# EAGLE board SAM3U_Test_Schematic (EAGLE 6.4)
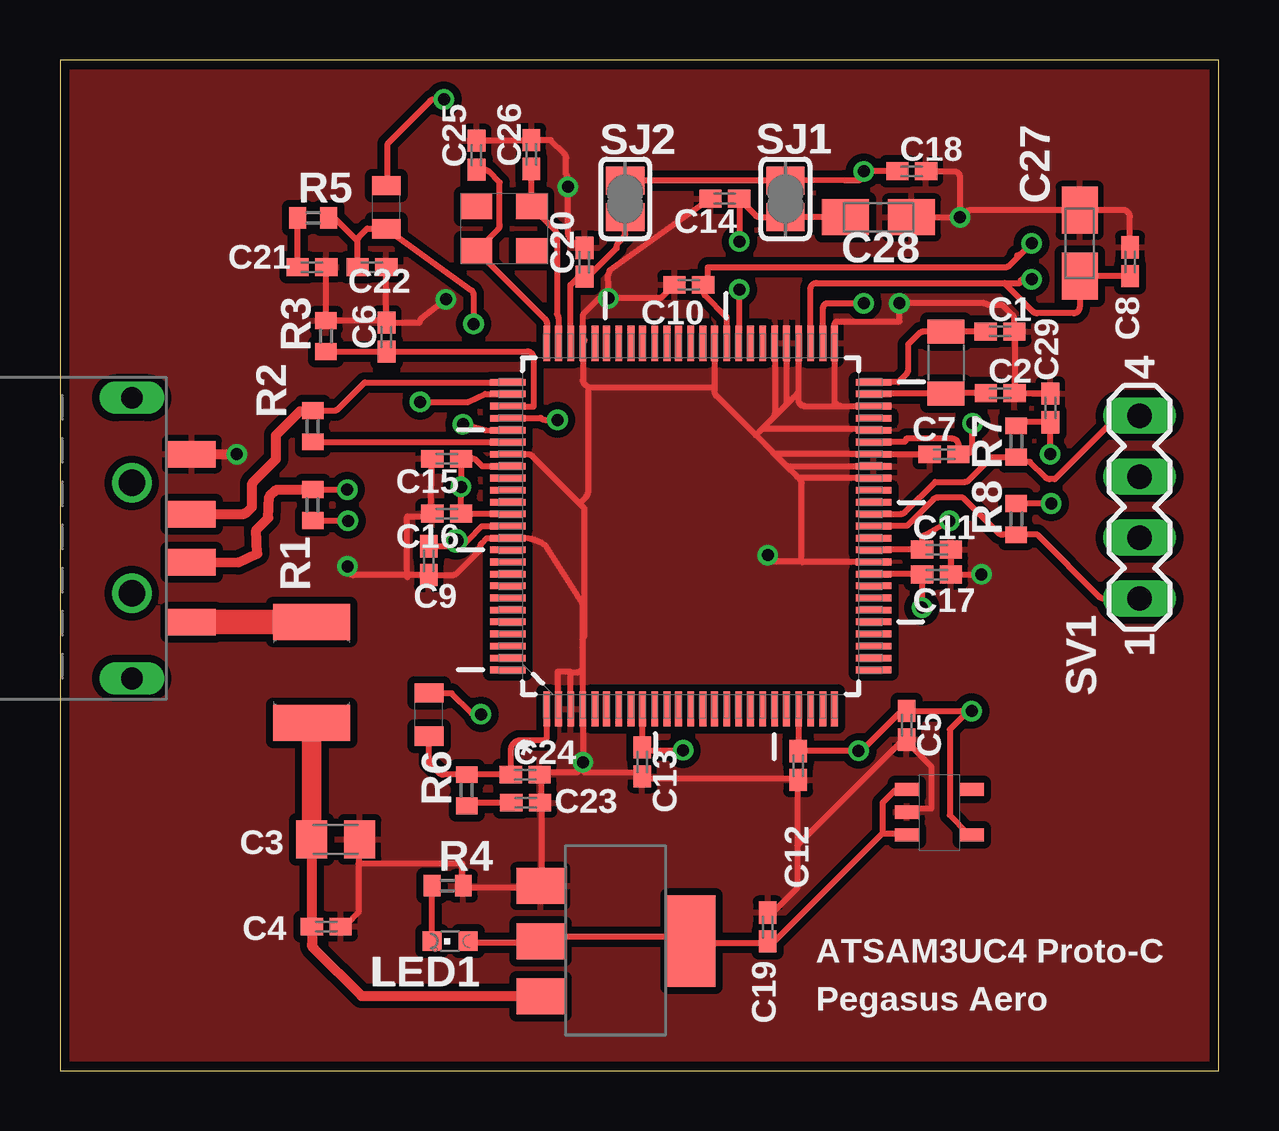
[diagram p0: board, top side]
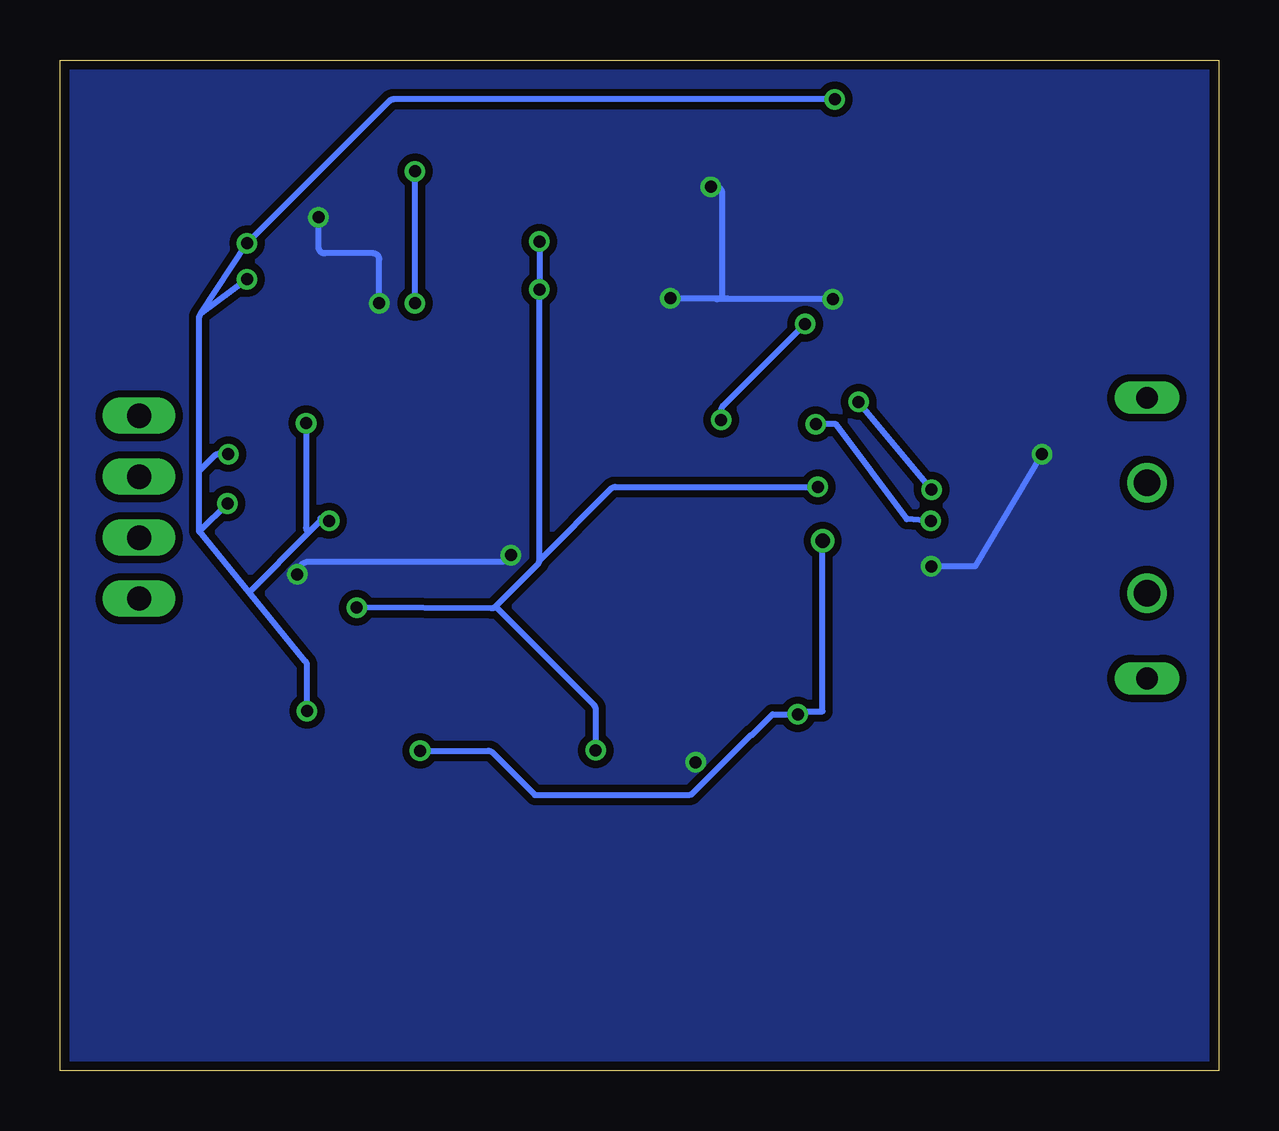
[diagram p1: board, bottom side, seen from below]

Size 48.3 x 42.14 mm. Coordinates in mm from the lower left corner, seen from the top.
Outline: 0,0 48.3,0 48.3,42.14 0,42.14 0,0
Copper layers (1*16): Top 0.0356mm / dielectric 1.5011mm / Bottom 0.0356mm
Design rules "LaenPCBOrder": minimum track width 6mil, minimum drill 13mil, track to track 6mil, track to pad 6mil, pad to pad 6mil, via to via 6mil, smd to smd 6mil, copper to edge 15mil, drill to drill 6mil, minimum pad ring 7mil, minimum via ring 7mil, stop-mask expansion 4mil, vias tented up to drill 0mil, thermal gap 10mil

## Footprints (pad centres in the part's own frame; a part is rotated, then mirrored left to right if it is on the bottom)
C0402K = smd 0.925 x 0.74: 1 -0.6,0; 2 0.6,0
C0805K = smd 1.3 x 1.6: 1 -1,0; 2 1,0
A/3216-18R = smd 1.95 x 1.5: + 1.375,0; - -1.375,0
TDK_MLZ_INDUCTOR_2012PACK = smd 0.8 x 1.2: 1 -0.4,0.6; 2 1.4,0.6
CHIPLED_0603 = smd 0.8 x 0.8: A 0,-0.75; C 0,0.75
R0402 = smd 0.7 x 0.9: 1 -0.65,0; 2 0.65,0
SJ = smd 1.168 x 1.6: 1 -0.762,0; 2 0.762,0
MA04-1 = drill 1.016 long: 1 -3.81,0; 2 -1.27,0; 3 1.27,0; 4 3.81,0
USB_TYPE_PLUG_KSTN_PACK = smd 1.1 x 2: 1 -3.5,-1.05; 2 -1,-1.05; 3 1,-1.05; 4 3.5,-1.05 | drill 0.9 pad 1.25 long: P$1 -5.85,1.45; P$2 5.85,1.45 | drill 1.1 pad 1.25: P$3 -2.3,1.45; P$4 2.3,1.45
QFP50P1600X1600X160-100N = smd 1.473 x 0.279: 1 -7.62,5.994; 2 -7.62,5.512; 3 -7.62,5.004; 4 -7.62,4.496; 5 -7.62,3.988; 6 -7.62,3.505; 7 -7.62,2.997; 8 -7.62,2.489; 9 -7.62,2.007; 10 -7.62,1.499; 11 -7.62,0.991; 12 -7.62,0.508; 13 -7.62,0; 14 -7.62,-0.508; 15 -7.62,-0.991; 16 -7.62,-1.499; 17 -7.62,-2.007; 18 -7.62,-2.489; 19 -7.62,-2.997; 20 -7.62,-3.505; 21 -7.62,-3.988; 22 -7.62,-4.496; 23 -7.62,-5.004; 24 -7.62,-5.512; 25 -7.62,-5.994; 51 7.62,-5.994; 52 7.62,-5.512; 53 7.62,-5.004; 54 7.62,-4.496; 55 7.62,-3.988; 56 7.62,-3.505; 57 7.62,-2.997; 58 7.62,-2.489; 59 7.62,-2.007; 60 7.62,-1.499; 61 7.62,-0.991; 62 7.62,-0.508; 63 7.62,0; 64 7.62,0.508; 65 7.62,0.991; 66 7.62,1.499; 67 7.62,2.007; 68 7.62,2.489; 69 7.62,2.997; 70 7.62,3.505; 71 7.62,3.988; 72 7.62,4.496; 73 7.62,5.004; 74 7.62,5.512; 75 7.62,5.994 | smd 0.279 x 1.473: 26 -5.994,-7.62; 27 -5.512,-7.62; 28 -5.004,-7.62; 29 -4.496,-7.62; 30 -3.988,-7.62; 31 -3.505,-7.62; 32 -2.997,-7.62; 33 -2.489,-7.62; 34 -2.007,-7.62; 35 -1.499,-7.62; 36 -0.991,-7.62; 37 -0.508,-7.62; 38 0,-7.62; 39 0.508,-7.62; 40 0.991,-7.62; 41 1.499,-7.62; 42 2.007,-7.62; 43 2.489,-7.62; 44 2.997,-7.62; 45 3.505,-7.62; 46 3.988,-7.62; 47 4.496,-7.62; 48 5.004,-7.62; 49 5.512,-7.62; 50 5.994,-7.62; 76 5.994,7.62; 77 5.512,7.62; 78 5.004,7.62; 79 4.496,7.62; 80 3.988,7.62; 81 3.505,7.62; 82 2.997,7.62; 83 2.489,7.62; 84 2.007,7.62; 85 1.499,7.62; 86 0.991,7.62; 87 0.508,7.62; 88 0,7.62; 89 -0.508,7.62; 90 -0.991,7.62; 91 -1.499,7.62; 92 -2.007,7.62; 93 -2.489,7.62; 94 -2.997,7.62; 95 -3.505,7.62; 96 -3.988,7.62; 97 -4.496,7.62; 98 -5.004,7.62; 99 -5.512,7.62; 100 -5.994,7.62
32678_KYOCERA_PACK = smd 1 x 1.55: 1 0.51,0.78; 2 3.1,0.78
MF-MSMF050-PACK = smd 1.5 x 3.2: 1 -0.75,1.6; 2 3.46,1.6
NCP1117-5-SOT = smd 1.5 x 2: 1 0,0; 2 2.3,0; 3 4.6,0 | smd 3.8 x 2: 4 2.3,6.3
LP2985-33DBVR-SO = smd 0.55 x 1: 1 0,0; 2 0.95,0; 3 1.9,0; 4 0,2.7; 5 1.9,2.7
AVX_12MHZ_CX3225GB_PACK = smd 1.3 x 1.05: 1 0.66,0.53; 2 2.95,0.53; 3 2.95,2.37; 4 0.66,2.38

## Placement (x,y rotation side)
C1  20pF  [C0402K]  39.18,30.82 0 top
C2  20pF  [C0402K]  39.19,28.25 0 top
C3  33uF  [C0805K]  11.49,9.65 0 top
C4  0.1uF  [C0402K]  11.1,6.02 0 top
C5  10uF  [C0402K]  35.29,14.41 270 top
C6  10pF  [C0402K]  13.61,30.59 90 top
C7  0.1uF  [C0402K]  36.85,25.7 180 top
C8  0.1uF  [C0402K]  44.6,33.73 90 top
C9  0.1uF  [C0402K]  15.37,21.27 270 top
C10  0.1uF  [C0402K]  26.21,32.77 180 top
C11  0.1uF  [C0402K]  36.54,21.73 0 top
C12  0.1uF  [C0402K]  30.77,12.73 270 top
C13  0.1uF  [C0402K]  24.27,12.88 270 top
C14  0.1uF  [C0402K]  27.71,36.36 180 top
C15  0.1uF  [C0402K]  16.12,25.52 180 top
C16  0.1uF  [C0402K]  16.12,23.23 180 top
C17  0.1uF  [C0402K]  36.54,20.69 0 top
C18  4.7uF  [C0402K]  35.5,37.5 0 top
C19  0.1uF  [C0402K]  29.5,6 90 top
C20  0.1uF  [C0402K]  21.86,33.71 90 top
C21  4.7uF  [C0402K]  10.5,33.5 0 top
C22  0.1uF  [C0402K]  13,33.5 0 top
C23  4.7uF  [C0402K]  19.41,11.18 0 top
C24  0.1uF  [C0402K]  19.39,12.35 0 top
C25  20pF  [C0402K]  17.36,38.17 90 top
C26  20pF  [C0402K]  19.65,38.2 90 top
C27  10uF  [A/3216-18R]  42.5,34.5 270 top
C28  10uF  [A/3216-18R]  34.12,35.58 180 top
C29  10nF  [C0402K]  41.28,27.64 90 top
L1  TDK_MLZ2012_INDUCTOR  [TDK_MLZ_INDUCTOR_2012PACK]  13,36.5 270 top
L2  TDK_MLZ2012_INDUCTOR  [TDK_MLZ_INDUCTOR_2012PACK]  14.78,15.35 270 top
LED1  [CHIPLED_0603]  16.26,5.41 90 top
R1  39R  [R0402]  10.54,23.59 270 top
R2  39R  [R0402]  10.54,26.87 270 top
R3  6.8K 1%  [R0402]  11.09,30.63 90 top
R4  220R  [R0402]  16.16,7.72 0 top
R5  1R  [R0402]  10.55,35.56 0 top
R6  1R  [R0402]  16.95,11.7 90 top
R7  4.7K  [R0402]  39.86,26.24 270 top
R8  4.7K  [R0402]  39.86,23 270 top
SJ1  [SJ]  30.24,36.35 270 top
SJ2  [SJ]  23.56,36.35 270 top
SV1  [MA04-1]  45,23.5 90 top
U$1  USB_TYPE_A_KEYSTN  [USB_TYPE_PLUG_KSTN_PACK]  4.45,22.21 90 top
U$2  ATSAM3UC4-PA  [QFP50P1600X1600X160-100N]  26.29,22.71 90 top
U$3  32678_KYOCERA  [32678_KYOCERA_PACK]  36.15,31.33 270 top
U$4  MF-MSMF050-2  [MF-MSMF050-PACK]  8.89,17.97 270 top
U$5  NCP1117-55V  [NCP1117-5-SOT]  20.03,7.71 270 top
U$6  LP2985-33DBVR5-PIN  [LP2985-33DBVR-SO]  35.31,11.74 270 top
U$7  AVX_12MHZ_CRYSTAL_CX3225GB  [AVX_12MHZ_CX3225GB_PACK]  16.71,33.66 0 top

## Library data of the parts
C1-C29 R1-R8 = rcl
L1 L2 = ic_inductor_pa
LED1 = led
SJ1 SJ2 = jumper
SV1 = con-lstb; OC_FARNELL: unknown; OC_NEWARK: unknown
U$1 = ic_usb_typeA_connector_pa
U$2 = Atmel_By_element14_Batch_1
U$3 U$7 = ic_crystal_pa
U$4 = ic_mf-msmf050_pa
U$5 U$6 = ic_voltage_reg_pa

## Nets
+3V3: C5.1 C7.1 C8.1 C9.1 C10.1 C11.1 C12.1 C27.+ C29.1 L1.1 L2.1 R7.1 R8.1 U$2.22 U$2.36 U$2.45 U$2.53 U$2.60 U$2.88 U$6.5
+5V: C19.1 LED1.A U$5.2 U$5.4 U$6.1 U$6.3
DFSDM: R1.2 U$2.80
DHSDM: R1.1 U$1.2 U$2.77
DHSDP: R2.1 U$1.3 U$2.76
GND: C1.2 C2.2 C3.2 C4.2 C5.2 C6.2 C7.2 C8.2 C9.2 C10.2 C11.2 C12.2 C13.2 C14.2 C15.2 C16.2 C17.2 C18.2 C19.2 C20.2 C21.2 C22.2 C23.2 C24.2 C25.2 C26.2 C27.- C28.- C29.2 R3.2 R4.2 U$1.4 U$2.2 U$2.3 U$2.4 U$2.35 U$2.42 U$2.43 U$2.44 U$2.46 U$2.48 U$2.51 U$2.54 U$2.55 U$2.56 U$2.61 U$2.72 U$2.82 U$2.89 U$5.1 U$6.2
N$1: C2.1 U$2.49 U$3.2
N$2: C1.1 U$2.50 U$3.1
N$3: C26.1 U$2.74 U$7.3
N$4: R2.2 U$2.81
N$5: C3.1 C4.1 U$4.2 U$5.3
N$6: LED1.C R4.1
N$7: C21.1 R5.1
N$8: C23.1 R6.1
N$9: C25.1 U$2.75 U$7.1
SCL0: R7.2 SV1.4 U$2.39
SDA0: R8.2 SV1.1 U$2.38
VBG: C6.1 R3.1 U$2.78
VBUS: U$1.1 U$4.1
VDDANA: C24.1 L2.2 R6.2 U$2.1
VDDCORE: C13.1 C14.1 C15.1 C16.1 C17.1 C28.+ SJ1.2 U$2.9 U$2.34 U$2.59 U$2.83 U$2.87
VDDOUT: C18.1 SJ1.1 SJ2.1 U$2.52
VDDPLL: C20.1 SJ2.2 U$2.73
VDDUTMI: C22.1 L1.2 R5.2 U$2.79

## Tracks (layer width: path | path; a pad name or v marks a point on that pad's centre or on a via)
+3V3  (via drill 0.5 pad 0.25, 0.61)
  Top 0.254: 39.9,34 arc45 40.07,34.07 v40.5,34.5 39.57,33.57 arc-45 39.4,33.5 27,33.5 27,32.96 arc-90 C10.1 26.81,32.52 arc45 26.88,32.34 27.79,31.43 U$2.60 arc-45 U$2.60 arc45 27.81,30.38 | U$2.53 arc-45 31.28,30.36 31.28,32.59 arc-90 31.53,32.84 39.37,32.84 | C9.1 16.51,21.87 | 16.51,21.87 16.64,21.87 arc45 16.82,21.94 17,22.12 arc-45 17.01,22.14 17.58,22.71 U$2.88 | L1.1 arc45 13.66,37.05 13.66,38.66 15.43,40.43 arc-45 15.61,40.5 v16,40.5 | U$2.36 arc-45 33.94,21.73 C11.1 35.94,22.14 arc-45 36.01,22.32 v37.08,22.93 | 37.44,25.68 arc-45 C7.1 | C7.1 37.45,26.1 arc90 37.2,26.35 35.28,26.35 arc-90 35.15,26.21 U$2.45 | v41.28,25.71 C29.1 40.12,27.04 arc45 39.94,26.97 R7.1 | v38.04,27 38,27 38,25.95 arc-90 37.75,25.7 C7.1 | 39.37,32.84 40.01,32.84 arc-90 40.17,33 v40.5,33 | 39.37,32.84 40.56,31.65 arc45 40.73,31.58 42.25,31.58 arc90 42.5,31.83 C27.+ arc-45 42.51,33.13 C8.1 | v41.32,23.65 R8.1 | U$2.22 arc-45 30.8,15.06 30.8,13.8 arc45 30.77,13.73 C12.1 arc-45 30.79,13.34 v33.29,13.34 33.53,13.46 35.05,14.99 C5.1 35.31,14.99 37.85,14.99 | v17.55,14.86 17.32,14.86 arc-45 17.14,14.93 16.33,15.74 15.4,15.74 arc-45 L2.1 | 37.85,14.99 37.08,14.22 37.08,10.67 37.85,9.91 U$6.5 | 37.85,14.99 v38,15 | v16.51,22.1 16.51,21.87 | 16.51,21.84 16.51,21.87
  Bottom 0.254: v38,15 38,16.89 arc-45 38.07,17.07 40.42,19.95 | 40.42,19.95 42.5,22.5 | 42.5,22.5 42.5,25 | 42.5,25 42.5,31.39 arc45 42.43,31.57 | 42.43,31.57 v40.5,34.5 34.57,40.43 arc45 34.4,40.5 v16,40.5 | v37.08,22.93 37.44,23.04 arc45 37.51,22.86 37.94,22.44 | 37.94,22.44 40.42,19.95 | 42.5,22.5 arc-45 42.45,22.52 v41.32,23.65 | v41.28,25.71 41.69,25.71 arc-45 41.86,25.64 42.5,25 | v38.04,27 38.04,22.64 arc-45 37.97,22.47 37.94,22.44 | v40.5,33 42.43,31.57 | v33.29,13.34 30.45,13.34 arc45 30.27,13.27 28.5,11.5 22.11,11.5 arc-45 21.93,11.57 19.5,14 arc-45 19.43,14.03 18.6,14.86 v17.55,14.86 17.53,14.99 16.51,14.99 v16.51,22.1
+5V
  Top 0.254: LED1.A 17.02,5.33 19.81,5.33 U$5.2 20.07,5.59 26.16,5.59 U$5.4 26.42,5.33 29.46,5.33 C19.1 29.72,5.33 34.29,9.91 | 34.29,9.91 35.31,9.91 U$6.3 | 34.29,9.91 34.29,11.18 34.8,11.68 35.31,11.68 U$6.1
DFSDM  (via drill 0.5 pad 0.25)
  Top 0.254: R1.2 11.98,22.94 arc-45 v12,22.93 | v16.8,26.96 17.73,26.71 U$2.80
  Bottom 0.254: v12,22.93 13,23 15.95,26.96 v16.8,26.96
DHSDM  (via drill 0.5 pad 0.25)
  Top 0.254: R1.1 11.95,24.24 arc-45 v11.97,24.23 | v15.01,27.89 17.03,27.89 17.73,28.22 U$2.77
  Top 0.406: U$1.2 7.43,21.2 8.22,21.56 8.18,22.55 8.68,23.05 8.72,23.94 9.04,24.23 R1.1
  Bottom 0.254: v11.97,24.23 v15.01,27.89
DHSDP
  Top 0.254: 18.66,28.71 arc-45 U$2.76 arc-45 18.66,28.7 12.7,28.7 11.59,27.59 arc-45 11.41,27.52 R2.1
  Top 0.406: U$1.3 7.61,23.21 arc45 7.78,23.28 8,23.5 8,24.39 arc-45 8.07,24.57 9,25.5 9,26.5 10,27.5 10.49,27.5 arc45 R2.1
GND  (via drill 0.5 pad 0.25)
  Top 0.254: 30.25,27.75 30.71,28.21 arc45 30.79,28.39 U$2.54 30.79,27.97 arc90 31.04,27.71 32.54,27.71 | 30.25,27.75 29.72,27.22 | 29.72,27.22 29.25,26.75 | 29.25,26.75 29,26.5 | U$2.55 30.28,27.82 arc-45 30.25,27.75 | U$2.56 29.8,27.4 arc-45 29.72,27.22 | U$2.61 27.28,28.5 | 27.28,28.5 27.28,28.32 arc45 27.36,28.14 29,26.5 | 32.54,27.71 arc-90 32.28,27.97 U$2.51 32.28,31.1 arc-90 32.42,31.24 34.99,31.24 v34.99,32 38.49,32 arc-45 38.67,31.93 arc-45 38.69,31.93 39.28,31.93 39.71,31.5 arc-45 39.78,31.32 C1.2 arc-45 39.81,30.74 39.81,28.24 | 32.54,27.71 U$2.48 | U$2.46 arc90 33.86,26.75 29.25,26.75 | 29.72,25.78 arc45 29.9,25.71 U$2.44 arc45 33.93,25.7 C7.2 | 29.72,25.78 29,26.5 | 21.8,16.86 U$2.4 arc-90 U$2.4 21.79,12.87 arc45 v21.8,12.86 | 21.8,16.86 21.8,17.61 arc-45 21.78,17.66 21.78,18 | U$2.3 arc-90 U$2.3 21.28,16.61 | 21.28,16.61 21.55,16.61 arc90 21.8,16.86 | U$2.2 arc-90 20.76,15.11 20.76,16.65 21.24,16.65 arc-90 21.28,16.61 | 21.78,18 21.78,19.46 20.19,21.94 arc45 18.93,22.2 U$2.89 arc45 18.65,22.21 17.79,22.21 17.59,22.01 arc45 17.52,21.84 17.52,21.72 16.54,20.74 arc-45 16.36,20.67 C9.2 14.48,20.67 | U$2.82 19.5,25.71 arc-45 19.68,25.63 21.66,23.66 | 21.66,23.66 21.85,23.46 21.85,18.17 arc-45 21.78,18 | 22,28.5 21.87,28.63 arc-45 21.79,28.81 U$2.72 arc45 21.86,30.49 arc-45 21.81,30.61 21.81,31.55 22.4,32.14 arc-45 22.57,32.21 v22.86,32.21 | 22,28.5 27.28,28.5 | 22,28.5 22,24.11 arc-45 21.93,23.93 21.66,23.66 | U$2.42 30.89,24.72 arc-45 30.71,24.79 | 30.71,24.79 30.23,25.27 | 30.23,25.27 29.72,25.78 | U$2.43 30.41,25.2 arc-45 30.23,25.27 | U$2.35 30.95,21.21 arc-45 30.91,21.23
  Top 0.254: 30.91,21.23 30.91,24.48 arc45 30.84,24.66 30.71,24.79 | 30.91,21.23 29.88,21.23 arc-45 29.7,21.3 v29.5,21.5 | C14.2 22.9,33.35 arc-45 22.83,33.18 v22.86,32.21 | v16.09,32.17 15.07,31.37 arc45 15,31.2 C6.2 13.59,31.21 arc45 13.41,31.28 | C15.2 15.44,23.26 arc-90 C16.2 15.49,23.11 14.48,23.11 14.48,20.67 | 14.48,20.67 12.23,20.67 arc-90 11.98,20.92 v11.98,21.03 | C20.2 arc-90 21.17,35.12 v21.17,36.85 21.17,37.17 arc45 21.1,37.35 21.1,38.05 arc45 21.02,38.23 20.45,38.8 C26.2 17.43,38.8 arc45 C25.2 | C10.2 25.12,32.28 arc-45 24.95,32.21 v22.86,32.21 | C18.2 37.27,37.5 arc-90 37.52,37.25 v37.52,35.58 | C28.- v37.52,35.58 | v38.41,20.7 arc-45 38.39,20.69 C17.2 C11.2 | C29.2 39.81,28.24 | 39.81,28.24 arc-45 C2.2 | v37.52,35.58 37.74,35.8 arc-45 37.92,35.88 C27.- arc45 42.51,35.87 44.43,35.87 44.53,35.77 arc-45 44.6,35.59 C8.2 | C21.2 arc45 11.09,33.48 R3.2 13.41,31.28 | 13.41,31.28 13.53,31.39 arc45 13.6,31.57 C22.2 | 30.73,9.4 30.73,11.94 C12.2 30.73,12.19 24.38,12.19 C13.2 24.13,12.45 21.84,12.45 21.84,12.7 v21.8,12.86 | 30.73,9.4 30.73,7.62 29.72,6.6 C19.2 | 30.73,9.4 35.05,13.72 C5.2 35.31,13.72 36.32,12.7 36.32,10.92 35.56,10.92 U$6.2 | 12.45,8.64 12.45,9.4 C3.2 | 12.45,8.64 12.45,6.6 11.94,6.1 C4.2 | 12.45,8.64 16.76,8.64 16.76,7.87 R4.2 17.02,7.62 19.81,7.62 U$5.1 20.07,7.87 20.07,11.18 C23.2 20.07,11.43 20.07,12.19 C24.2 20.07,12.45 21.59,12.45 21.59,12.7 v21.8,12.86 | 14.48,20.57 14.48,20.67
  Top 0.406: U$1.4 v7.37,25.71
  Bottom 0.254: v22.86,32.21 21,32.21 | 21,32.21 20.7,32.21 | 20.7,32.21 20.47,32.21 | v16.09,32.17 20.9,32.17 arc45 21,32.21 | v7.37,25.71 10.16,21.03 v11.98,21.03 | v21.17,36.85 20.95,36.85 arc90 20.7,36.6 20.7,32.21 | v34.99,32 34.99,33.83 arc-90 35.24,34.08 37.27,34.08 arc90 37.52,34.33 v37.52,35.58 | v38.41,20.7 arc90 37.92,21.23 29.88,21.23 arc-45 29.7,21.3 v29.5,21.5
  pour Top (isolate 0.305): 0,42 48.25,42 arc-90 48.5,41.75 48.5,0 0.25,0 arc-90 0,0.25
  pour Bottom (isolate 0.305): 0,42 48.25,42 arc-90 48.5,41.75 48.5,0 0.25,0 arc-90 0,0.25
N$1
  Top 0.254: C2.1 36.98,28.25 arc45 U$3.2 33.93,28.23 arc45 U$2.49
N$2
  Top 0.254: C1.1 U$3.1 35.99,30.82 arc45 35.82,30.75 35.35,30.28 35.35,29.23 arc-45 35.28,29.05 34.94,28.71 33.92,28.71 arc45 U$2.50
N$3
  Top 0.254: U$2.74 20.78,31.39 arc45 20.71,31.55 20.71,34.88 arc45 20.64,35.05 U$7.3 arc-45 19.65,36.05 C26.1
N$4
  Top 0.254: R2.2 18.66,26.22 arc-45 U$2.81
N$5
  Top 0.406: C3.1 10.49,6.04 arc45 C4.1 10.5,5.29 arc45 10.57,5.12 12.57,3.12 20.01,3.12 arc-45 U$5.3
  Top 0.813: 10.5,9.67 arc-45 C3.1 U$4.2
N$6
  Top 0.254: LED1.C 15.49,5.59 15.49,7.62 R4.1
N$7
  Top 0.254: C21.1 R5.1
N$8
  Top 0.254: C23.1 17.18,11.18 arc45 17.01,11.11 R6.1
N$9
  Top 0.254: U$2.75 20.3,31.16 arc45 20.22,31.34 U$7.1 18.26,35.08 arc45 18.33,35.26 18.33,37.03 17.86,37.5 arc45 17.68,37.57 C25.1
SCL0
  Top 0.254: U$2.39 35.04,23.22 arc45 35.22,23.29 36.48,24.55 37.7,24.55 arc45 37.88,24.62 38.84,25.58 39.84,25.58 arc45 R7.2 39.99,25.46 arc45 40.16,25.39 40.43,25.39 41.08,24.74 arc45 41.26,24.67 41.46,24.67 44.03,27.24 arc-45 44.2,27.31 SV1.4
SDA0
  Top 0.254: SV1.1 43.51,19.69 arc-45 43.33,19.76 40.74,22.35 R8.2 39.3,22.35 arc-45 39.12,22.42 37.64,23.9 36.59,23.9 arc45 36.41,23.83 35.3,22.72 33.93,22.72 arc45 U$2.38
VBG
  Top 0.254: U$2.78 arc90 18.7,27.68 19.73,27.68 19.73,29.74 arc90 19.48,29.99 C6.1 arc-45 13.59,29.98 R3.1
VBUS
  Top 1.016: U$1.1 10.47,18.71 arc45 U$4.1
VDDANA
  Top 0.254: U$2.1 20.3,13.96 arc-45 20.22,13.78 19.21,13.78 arc90 18.79,13.36 C24.1 R6.2 15.97,12.35 arc-45 15.8,12.42 15.38,12.84 L2.2
VDDCORE  (via drill 0.5 pad 0.25)
  Top 0.254: U$2.83 arc-45 18.65,25.19 arc45 U$2.83 | U$2.87 arc45 18.64,23.23 C16.1 arc-45 16.71,23.25 v16.71,24.34 16.71,25.5 arc-45 C15.1 17.18,25.52 arc-45 17.36,25.45 17.61,25.2 U$2.83 arc-45 U$2.83 | C14.1 arc-45 28.32,36.34 | 28.32,36.34 v28.32,34.57 | v28.32,32.57 arc45 28.3,32.51 U$2.59 | v35.93,19.31 arc45 35.94,19.33 C17.1 arc45 35.91,20.7 U$2.34 | v25.97,13.36 24.5,13.36 arc-45 24.32,13.43 C13.1 arc45 24.28,13.51 U$2.9 | C28.+ SJ1.2 arc-90 SJ1.2 29.17,35.59 arc-45 28.99,35.66 28.32,36.34
  Bottom 0.254: v28.32,34.57 v28.32,32.57 28.32,21.29 | 30.15,19.35 28.39,21.11 arc-45 28.32,21.29 | 30.15,19.35 arc45 30.32,19.28 v35.93,19.31 | 30.15,19.35 26.04,15.25 arc45 25.97,15.07 v25.97,13.36 | 28.32,21.29 25.34,24.27 arc45 25.16,24.34 v16.71,24.34
VDDOUT  (via drill 0.5 pad 0.25)
  Top 0.254: v33.5,32 32,32 arc90 31.81,31.81 31.81,30.35 arc-45 U$2.52 | v33.5,37.5 33.6,37.5 | C18.1 v33.5,37.5 | v33.5,37.5 33.5,37.37 arc-90 33.25,37.12 32.7,37.12 SJ1.1 SJ2.1
  Bottom 0.254: v33.5,32 v33.5,37.5
VDDPLL
  Top 0.254: U$2.73 arc-45 21.28,30.34 21.28,32.76 21.56,33.04 arc-45 21.73,33.11 C20.1 21.91,33.11 arc45 22.09,33.18 23.2,34.29 23.2,34.34 arc-45 23.27,34.52 23.49,34.74 arc45 23.56,34.91 SJ2.2
VDDUTMI  (via drill 0.5 pad 0.25)
  Top 0.254: U$2.79 arc-45 18.7,27.22 20.03,27.22 20.04,27.21 arc45 20.21,27.14 v20.74,27.14 | v17.24,31.14 17.24,32.35 arc45 17.17,32.53 L1.2 arc45 13.58,35.11 12.81,35.11 12.47,34.77 arc45 12.4,34.59 | C22.1 12.4,34.59 | R5.2 11.33,35.56 arc-45 11.51,35.49 12.4,34.59
  Bottom 0.254: v17.24,31.14 20.67,27.71 arc-45 20.74,27.54 v20.74,27.14

## Text on the board
tDocu: ATSAM3UC4 Proto-C | Pegasus Aero
_tsilk: C27 | C25 | C26 | SJ2 | SJ1 | C18 | R5 | C14 | C28 | C21 | C20 | C22 | C10 | C1 | R2 | R3 | C6 | C8 | C2 | C29 | 4 | C7 | R7 | C15 | R8 | C16 | R1 | C11 | C9 | C17 | 1 | SV1 | C5 | C24 | * | C13 | R6 | C23 | C12 | C3 | R4 | C4 | LED1 | ATSAM3UC4 Proto-C | C19 | Pegasus Aero